# EAGLE board EE02Breakout (EAGLE 7.6.0)
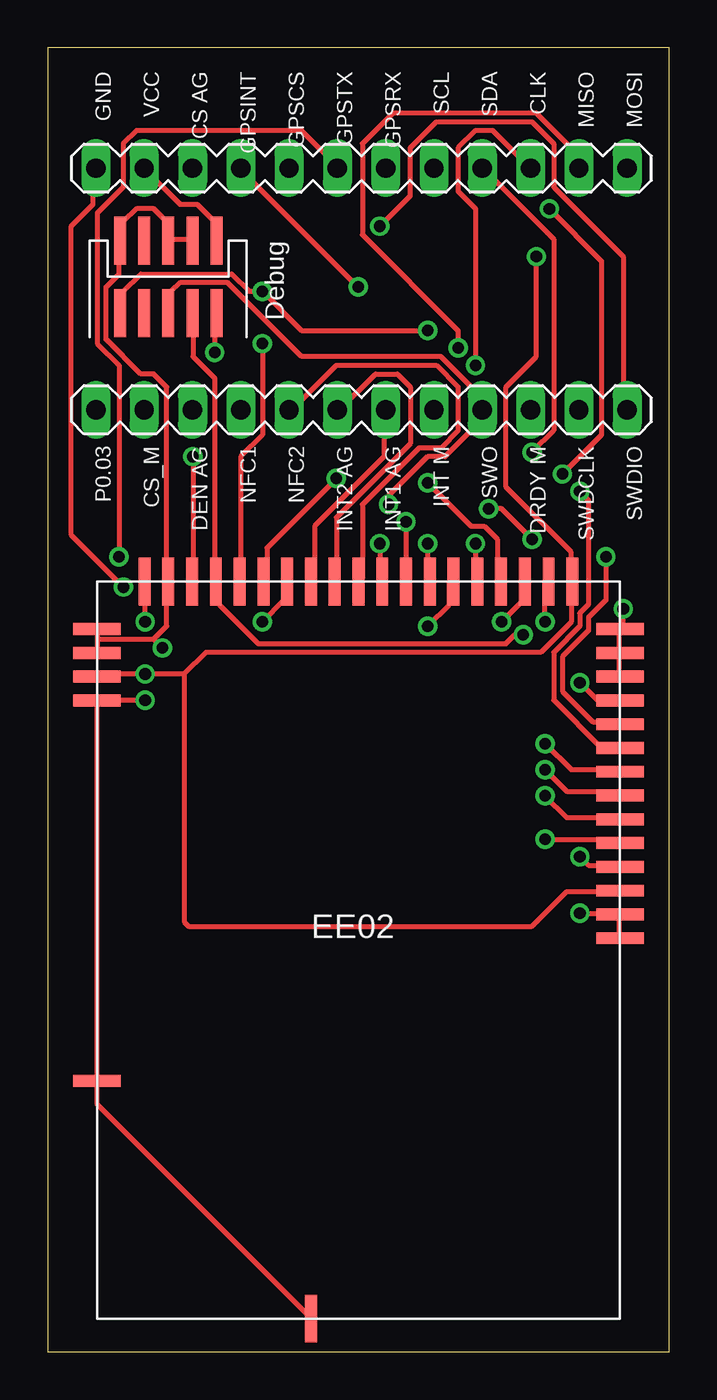
[diagram p0: board, top side]
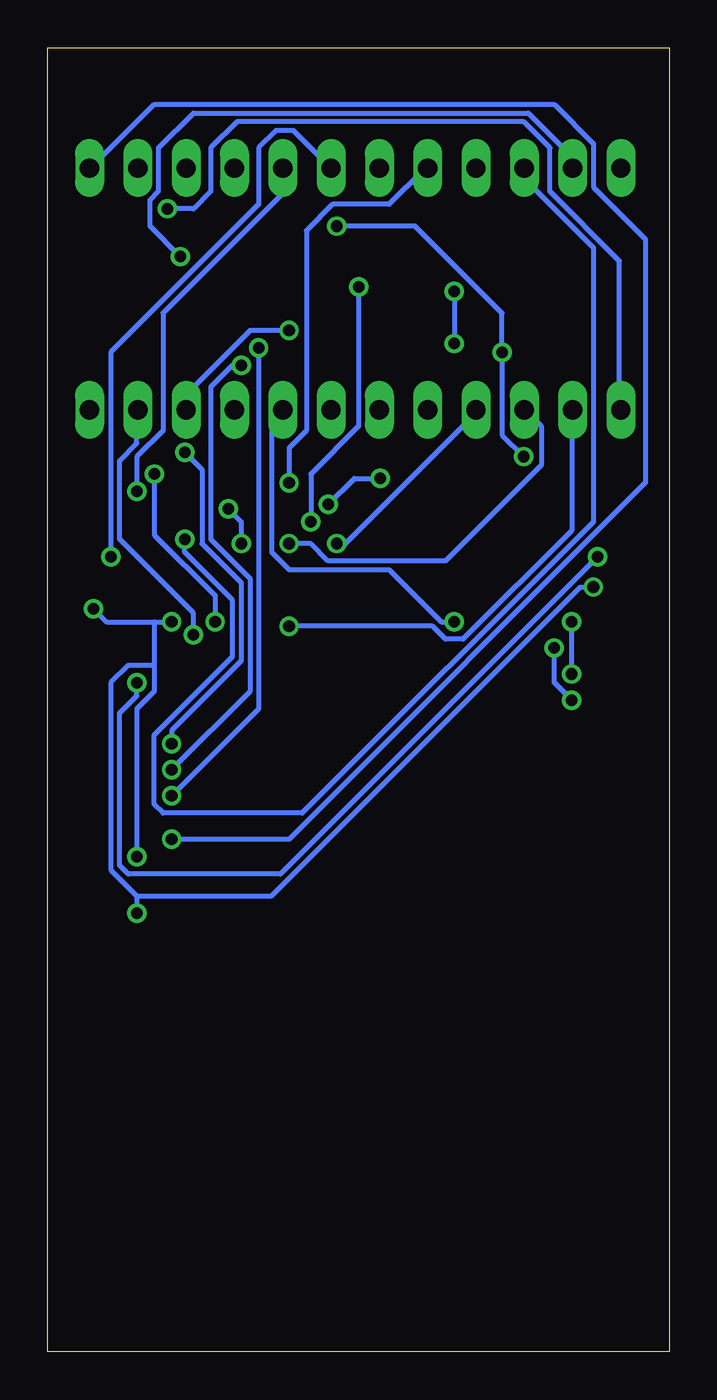
[diagram p1: board, bottom side, seen from below]

Size 32.69 x 68.57 mm. Coordinates in mm from the lower left corner, seen from the top.
Outline: 0,0 32.69,0 32.69,68.57 0,68.57 0,0
Copper layers (1*16): Top 0.035mm / dielectric 1.5mm / Bottom 0.035mm
Design rules "default": minimum track width 10mil, minimum drill 24mil, track to track 8mil, track to pad 8mil, pad to pad 8mil, via to via 8mil, smd to smd 8mil, copper to edge 40mil, drill to drill 8mil, minimum pad ring 10mil, minimum via ring 8mil, stop-mask expansion 4mil, vias tented up to drill 0mil, thermal gap 10mil
tRestrict: area 7.6,22.9 to 25.4,35.6

## Footprints (pad centres in the part's own frame; a part is rotated, then mirrored left to right if it is on the bottom)
BRH1 = drill 1.016 long: 1_MOSI -13.97,0; 2_MISO -11.43,0; 3_CLK -8.89,0; 4_SDA -6.35,0; 5_SCL -3.81,0; 6_GPS_RX -1.27,0; 7_GPS_TX 1.27,0; 8_GPS_CS 3.81,0; 9_GPS_INT 6.35,0; 10_CS_AG 8.89,0; 11_VCC 11.43,0; 12_GND 13.97,0
EE02 = smd 2.5 x 0.625: P$1 23.75,-10; P$2 23.75,-8.75; P$3 23.75,-7.5; P$4 23.75,-6.25; P$5 23.75,-5; P$6 23.75,-3.75; P$7 23.75,-2.5; P$8 23.75,-1.25; P$9 23.75,0; P$10 23.75,1.25; P$11 23.75,2.5; P$12 23.75,3.75; P$13 23.75,5; P$14 23.75,6.25; P$34 -3.75,6.25; P$35 -3.75,5; P$36 -3.75,3.75; P$37 -3.75,2.5; P$38 -3.75,-17.5 | smd 0.625 x 2.5: P$15 21.25,8.75; P$16 20,8.75; P$17 18.75,8.75; P$18 17.5,8.75; P$19 16.25,8.75; P$20 15,8.75; P$21 13.75,8.75; P$22 12.5,8.75; P$23 11.25,8.75; P$24 10,8.75; P$25 8.75,8.75; P$26 7.5,8.75; P$27 6.25,8.75; P$28 5,8.75; P$29 3.75,8.75; P$30 2.5,8.75; P$31 1.25,8.75; P$32 0,8.75; P$33 -1.25,8.75; P$39 7.5,-30
NRF52-P19-CONNECTOR = smd 2.54 x 0.635: GND -15.24,10.16; GND$5 -15.24,8.89; GND_DETECT -15.24,6.35; NC -15.24,7.62; NC$8 -11.43,7.62; RESET -11.43,6.35; SWDCLK -11.43,10.16; SWDIO -11.43,11.43; SWO -11.43,8.89; VCC -15.24,11.43
BRH2 = drill 1.016 long: 1_SWDIO -13.97,0; 2_SWDCLK -11.43,0; 3_DRDY_M -8.89,0; 4_SWO -6.35,0; 5_INT_M -3.81,0; 6_INT1_AG -1.27,0; 7_INT2_AG 1.27,0; 8_NFC2 3.81,0; 9_NFC1 6.35,0; 10_DEN_AG 8.89,0; 11_CS_M 11.43,0; 12_P0.03 13.97,0

## Placement (x,y rotation side)
SV1  [BRH1]  16.51,62.23 180 top
U$1  EE02  [EE02]  6.35,31.75 0 top
U$2  DEBUGHEADER  [NRF52-P19-CONNECTOR]  -2.54,43.18 270 top
U$3  BREAKOUT_HEADER_2  [BRH2]  16.51,49.53 180 top

## Library data of the parts
SV1 = EE; OC_FARNELL: unknown; OC_NEWARK: unknown
U$1-U$3 = EE

## Nets
GND: U$1.P$32 U$1.P$34 U$1.P$35 U$1.P$37 U$1.P$38 U$1.P$39 U$2.GND U$2.GND$5 U$2.GND_DETECT
N$1: SV1.12_GND U$1.P$1 U$1.P$2 U$1.P$4 U$1.P$12 U$1.P$13 U$1.P$14 U$1.P$16
N$2: U$1.P$21 U$3.10_DEN_AG
N$3: U$1.P$20 U$3.11_CS_M
N$4: SV1.10_CS_AG U$1.P$19
N$5: SV1.9_GPS_INT U$1.P$22
N$6: SV1.8_GPS_CS U$1.P$18
N$7: SV1.7_GPS_TX U$1.P$11
N$8: SV1.6_GPS_RX U$1.P$10
N$9: SV1.5_SCL U$1.P$9
N$10: SV1.4_SDA U$1.P$8
N$11: SV1.3_CLK U$1.P$7
N$12: SV1.2_MISO U$1.P$6
N$13: SV1.1_MOSI U$1.P$5
N$14: U$1.P$31 U$2.SWDIO U$3.1_SWDIO
N$15: U$1.P$30 U$2.SWDCLK U$3.2_SWDCLK
N$16: U$1.P$29 U$2.RESET U$3.3_DRDY_M
N$17: U$1.P$28 U$2.SWO U$3.4_SWO
N$18: U$1.P$27 U$3.5_INT_M
N$19: U$1.P$26 U$3.6_INT1_AG
N$20: U$1.P$25 U$3.7_INT2_AG
N$21: U$1.P$24 U$3.8_NFC2
N$22: U$1.P$23 U$3.9_NFC1
N$23: U$1.P$17 U$3.12_P0.03
VCC: SV1.11_VCC U$1.P$3 U$1.P$15 U$1.P$33 U$1.P$36 U$2.VCC

## Tracks (layer width: path | path; a pad name or v marks a point on that pad's centre or on a via)
GND  (via drill 0.61)
  Top 0.254: U$2.GND 7.42,58.5 6.5,58.5 U$2.GND$5 6.27,58.5 6.27,59.41 5.59,60.1 4.67,60.1 3.99,59.41 3.99,58.5 U$2.GND_DETECT 3.76,58.27 3.76,56.67 3.07,55.98 3.07,53.24 4.9,51.41 5.59,51.41 6.27,50.72 6.27,40.66 U$1.P$32 6.27,40.44 6.27,38.15 5.59,37.47 | 2.62,37.47 2.62,37.92 U$1.P$34 | 2.62,37.47 2.62,36.78 U$1.P$35 | 2.62,37.47 5.59,37.47 | U$1.P$39 13.82,1.8 2.62,13 2.62,14.15 U$1.P$38 2.62,14.38 2.62,34.04 U$1.P$37 2.62,34.27 v5.13,34.27 | v6.04,37.01 5.59,37.47
  Bottom 0.254: v6.04,37.01 6.04,35.18 v5.13,34.27
N$1  (via drill 0.61)
  Top 0.254: U$1.P$12 30.05,35.64 30.05,36.55 U$1.P$13 30.05,36.78 30.05,37.92 U$1.P$14 30.28,38.15 v30.28,39.06 | U$1.P$1 30.05,21.92 30.05,22.84 U$1.P$2 30.05,23.06 v27.99,23.06 | v26.16,38.38 26.16,40.44 U$1.P$16 | v27.99,26.04 28.45,25.58 30.05,25.58 U$1.P$4 | v3.99,40.21 1.24,42.95 1.24,59.18 2.39,60.33 2.39,62.15 SV1.12_GND
  Bottom 0.254: 27.08,38.38 29.59,38.38 v30.28,39.06 | 27.08,38.38 v26.16,38.38 | v27.99,26.04 27.99,33.81 27.08,34.72 27.08,36.09 | 27.08,38.38 27.08,36.09 | 27.99,23.98 v27.99,23.06 | 27.99,23.98 29.36,25.35 29.36,35.18 28.45,36.09 27.08,36.09 | v3.99,40.21 4.67,40.21 20.9,23.98 27.99,23.98
N$2  (via drill 0.61)
  Top 0.254: v19.99,42.49 19.99,40.66 U$1.P$21
  Bottom 0.254: v19.99,42.49 18.85,42.49 17.93,41.58 11.76,41.58 6.73,46.61 6.73,48.67 7.42,49.35 U$3.10_DEN_AG
N$3  (via drill 0.61)
  Top 0.254: v19.99,38.15 21.13,39.29 21.13,40.44 U$1.P$20
  Bottom 0.254: v19.99,38.15 12.45,38.15 11.76,37.47 10.85,37.47 5.13,43.18 5.13,49.35 U$3.11_CS_M
N$4  (via drill 0.61)
  Top 0.254: v22.5,42.49 22.5,40.66 U$1.P$19 | v23.19,44.32 23.88,44.32 v25.48,42.72
  Bottom 0.254: v22.5,42.49 22.5,43.64 v23.19,44.32 | v25.48,42.72 25.48,42.04 22.96,39.52 22.96,36.55 27.08,32.44 27.08,28.78 26.62,28.32 19.3,28.32 3.99,43.64 3.99,58.04 7.42,61.47 7.42,62.15 SV1.10_CS_AG
N$5  (via drill 0.61)
  Top 0.254: v18.85,43.64 18.85,40.66 U$1.P$22 | v16.33,55.98 10.16,62.15 SV1.9_GPS_INT
  Bottom 0.254: v18.85,43.64 18.85,46.15 16.33,48.67 v16.33,55.98
N$6  (via drill 0.61)
  Top 0.254: v19.99,45.7 22.28,43.41 22.96,43.41 23.65,42.72 23.65,40.66 U$1.P$18
  Bottom 0.254: v19.99,45.7 19.99,47.52 19.07,48.44 19.07,58.95 17.7,60.33 14.73,60.33 12.9,62.15 SV1.8_GPS_CS
N$7  (via drill 0.61)
  Top 0.254: v27.99,35.18 28.91,34.27 30.05,34.27 U$1.P$11 | v3.76,41.81 3.76,51.87 2.62,53.01 2.62,59.87 3.99,61.24 3.99,63.52 4.67,64.21 13.36,64.21 15.19,62.38 SV1.7_GPS_TX
  Bottom 0.254: v27.99,35.18 27.99,34.49 28.91,33.58 28.91,25.58 28.45,25.12 20.45,25.12 v3.76,41.81
N$8  (via drill 0.61)
  Top 0.254: v29.36,41.81 29.36,39.52 28.45,38.61 28.45,37.92 27.08,36.55 27.08,34.72 28.68,33.12 30.05,33.12 U$1.P$10
  Bottom 0.254: v29.36,41.81 29.36,52.55 21.59,60.33 21.59,63.3 20.68,64.21 19.76,64.21 SV1.6_GPS_RX
N$9  (via drill 0.61)
  Top 0.254: U$1.P$9 29.13,31.75 26.62,34.27 26.62,36.78 27.99,38.15 27.99,38.84 28.45,39.29 28.45,44.78 v27.99,45.24
  Bottom 0.254: v27.99,45.24 27.99,47.07 26.62,48.44 26.62,54.61 20.45,60.78 20.45,62.15 SV1.5_SCL
N$10  (via drill 0.61)
  Top 0.254: v26.16,31.98 27.53,30.61 30.05,30.61 U$1.P$8 | v25.48,47.3 26.62,48.44 26.62,58.5 22.96,62.15 SV1.4_SDA
  Bottom 0.254: v26.16,31.98 26.16,32.66 22.5,36.32 22.5,40.44 24.56,42.49 24.56,46.38 v25.48,47.3
N$11  (via drill 0.61)
  Top 0.254: v26.16,30.61 27.3,29.46 30.05,29.46 U$1.P$7 | v22.5,51.87 22.5,60.1 21.59,61.01 21.59,63.3 22.5,64.21 23.42,64.21 SV1.3_CLK
  Bottom 0.254: v26.16,30.61 22.05,34.72 22.05,40.66 24.1,42.72 24.1,50.72 22.96,51.87 v22.5,51.87
N$12  (via drill 0.61)
  Top 0.254: v26.16,29.23 27.3,28.09 30.05,28.09 U$1.P$6 | v21.59,52.78 21.59,53.7 16.56,58.73 16.56,63.52 18.16,65.13 25.7,65.13 27.76,63.07 27.76,62.38 SV1.2_MISO
  Bottom 0.254: v26.16,29.23 21.59,33.81 v21.59,52.78
N$13  (via drill 0.61)
  Top 0.254: v26.16,26.95 30.05,26.95 U$1.P$5
  Bottom 0.254: v26.16,26.95 19.99,26.95 1.24,45.7 1.24,58.5 3.99,61.24 3.99,63.52 6.04,65.58 27.08,65.58 30.28,62.38 SV1.1_MOSI
N$14  (via drill 0.61)
  Top 0.254: v7.64,47.07 7.64,40.66 U$1.P$31 | v8.79,52.55 8.79,54.61 U$2.SWDIO | v17.47,59.18 19.07,60.78 19.07,63.3 20.45,64.67 25.48,64.67 26.62,63.52 26.62,61.24 30.28,57.58 30.28,49.58 U$3.1_SWDIO
  Bottom 0.254: v7.64,47.07 8.79,48.21 v8.79,52.55 8.79,54.61 13.36,59.18 v17.47,59.18
N$15  (via drill 0.61)
  Top 0.254: U$2.SWDCLK 7.64,54.61 7.64,52.32 8.79,51.18 8.79,40.66 U$1.P$30 9.02,40.44 9.02,39.29 11.07,37.24 24.1,37.24 24.56,37.69 v25.02,37.69
  Bottom 0.254: v25.02,37.69 25.02,38.84 28.91,42.72 28.91,46.84 27.99,47.75 27.99,49.35 U$3.2_SWDCLK
N$16  (via drill 0.61)
  Top 0.254: v11.3,53.01 11.3,48.21 10.16,47.07 10.16,40.66 U$1.P$29 | U$2.RESET 3.99,54.61 3.99,55.75 4.9,56.67 9.7,56.67 10.62,55.75 v11.3,55.75 13.36,53.7 v19.99,53.7
  Bottom 0.254: v11.3,55.75 v11.3,53.01 | v19.99,53.7 22.05,53.7 25.25,50.49 25.25,49.58 U$3.3_DRDY_M
N$17  (via drill 0.61)
  Top 0.254: v15.19,45.92 11.53,42.27 11.53,40.66 U$1.P$28 | v17.93,44.55 17.93,45.01 19.99,47.07 20.9,47.07 22.73,48.9 22.73,49.35 U$3.4_SWO 22.73,49.58 22.73,50.27 20.68,52.32 13.36,52.32 9.47,56.21 6.96,56.21 6.5,55.75 6.5,54.61 U$2.SWO
  Bottom 0.254: v15.19,45.92 16.56,45.92 v17.93,44.55
N$18  (via drill 0.61)
  Top 0.254: v11.3,38.38 12.45,39.52 12.45,40.44 U$1.P$27
  Bottom 0.254: v11.3,38.38 11.99,38.38 14.73,41.12 19.99,41.12 20.9,42.04 20.9,48.9 20.45,49.35 U$3.5_INT_M
N$19
  Top 0.254: U$1.P$26 14.05,40.66 14.05,43.41 17.7,47.07 17.7,49.35 U$3.6_INT1_AG
N$20
  Top 0.254: U$1.P$25 15.19,40.66 15.19,43.87 19.07,47.75 19.07,50.72 18.39,51.41 17.25,51.41 15.42,49.58 U$3.7_INT2_AG
N$21
  Top 0.254: U$1.P$24 16.56,40.66 16.56,44.55 19.53,47.52 20.68,47.52 21.59,48.44 21.59,50.72 20.45,51.87 15.19,51.87 12.9,49.58 U$3.8_NFC2
N$22  (via drill 0.61)
  Top 0.254: v17.47,42.49 17.47,40.66 U$1.P$23
  Bottom 0.254: v17.47,42.49 17.02,42.49 10.16,49.35 U$3.9_NFC1
N$23  (via drill 0.61)
  Top 0.254: v23.88,38.38 25.02,39.52 25.02,40.44 U$1.P$17 | v27.08,46.15 29.13,48.21 29.13,57.35 v26.39,60.1
  Bottom 0.254: v23.88,38.38 23.88,39.75 27.08,42.95 v27.08,46.15 | v26.39,60.1 25.02,60.1 24.1,61.01 24.1,63.3 22.73,64.67 7.64,64.67 6.27,63.3 6.27,61.01 2.62,57.35 2.62,49.58 U$3.12_P0.03
VCC  (via drill 0.61)
  Top 0.254: U$2.VCC 8.79,58.5 8.79,59.41 7.87,60.33 6.96,60.33 5.13,62.15 SV1.11_VCC | 7.19,35.64 v5.13,35.64 2.62,35.64 U$1.P$36 | 7.19,35.64 8.33,36.78 25.93,36.78 27.53,38.38 27.53,40.44 U$1.P$15 27.53,40.66 27.53,42.04 24.1,45.47 24.1,50.72 25.7,52.32 v25.7,57.58 | 7.19,35.64 7.19,22.61 7.42,22.38 25.48,22.38 27.3,24.21 30.05,24.21 U$1.P$3 | v5.13,38.38 5.13,40.44 U$1.P$33
  Bottom 0.254: v5.13,35.64 v5.13,38.38 | v25.7,57.58 27.3,59.18 27.3,60.55 26.85,61.01 26.85,63.3 25.02,65.13 7.42,65.13 5.13,62.84 5.13,62.38 SV1.11_VCC